# EAGLE board dac8 (EAGLE 5.06)
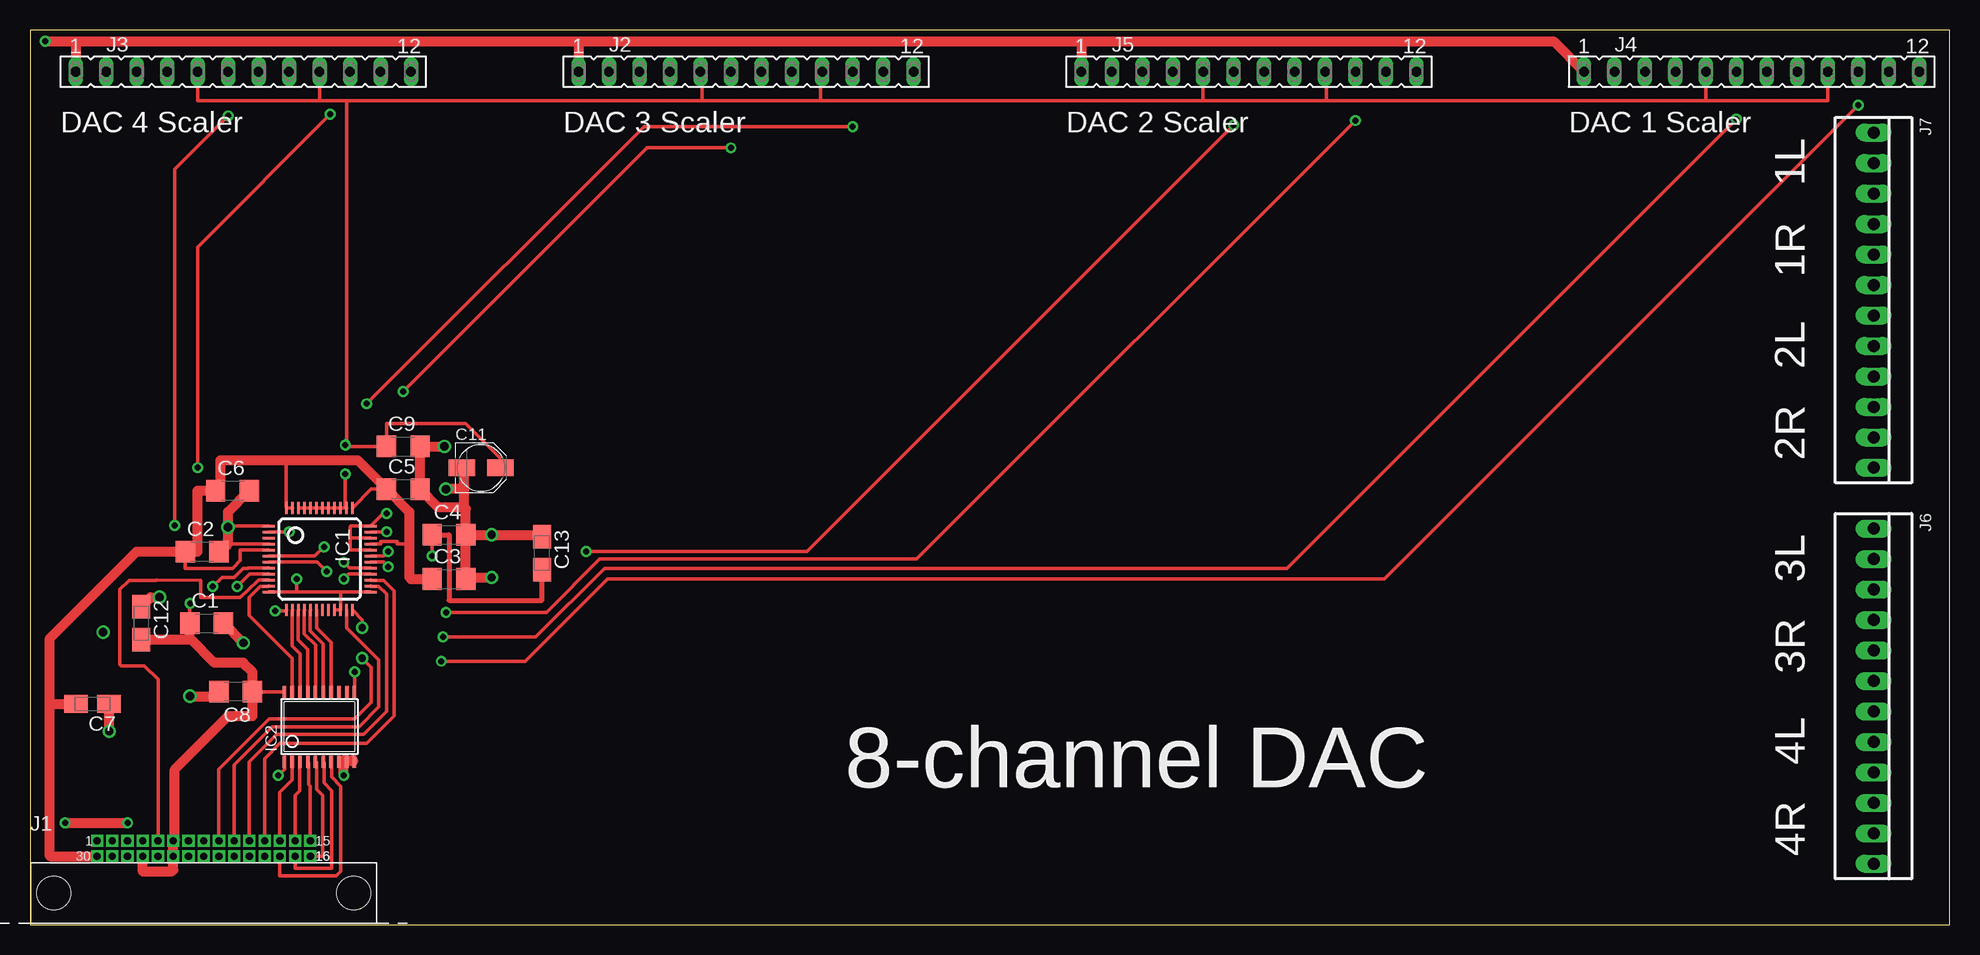
[diagram p0: board, top side]
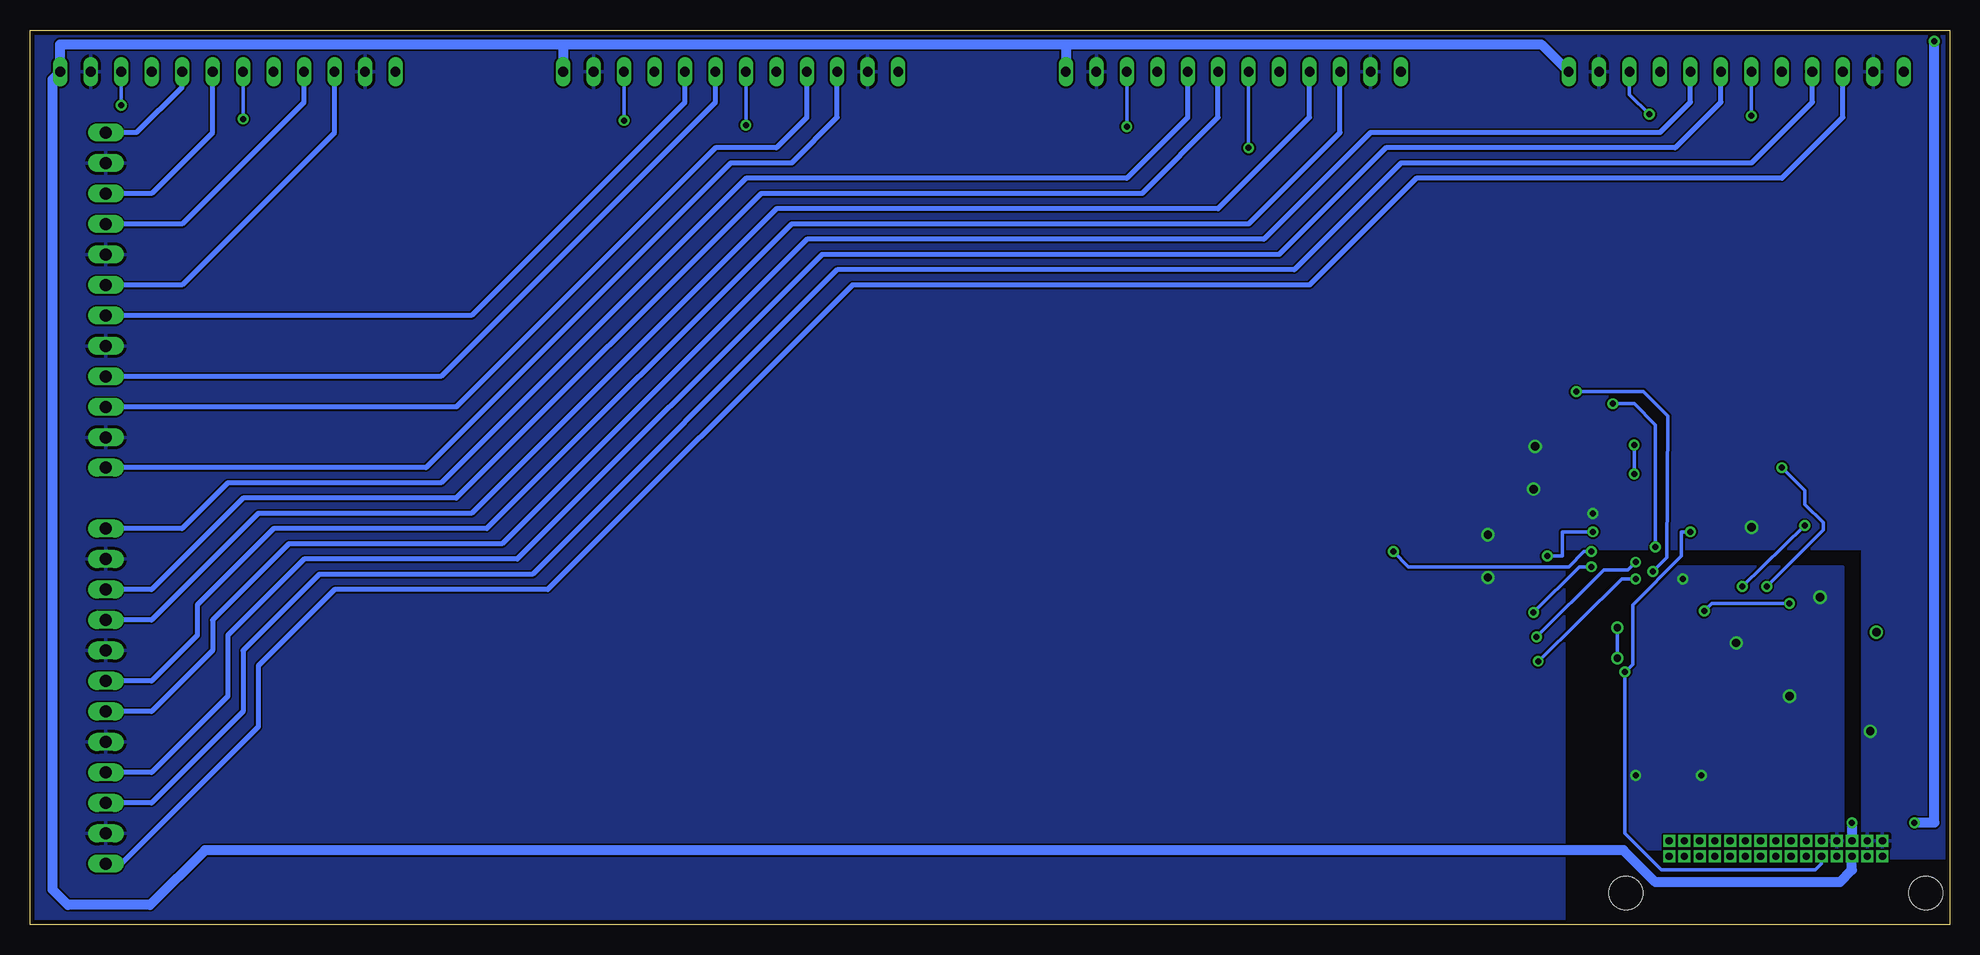
[diagram p1: board, bottom side, seen from below]

Size 160 x 74.6 mm. Coordinates in mm from the lower left corner, seen from the top.
Outline: 0,0 160,0 160,74.6 0,74.6 0,0
Copper layers (1*16): Top 0.035mm / dielectric 1.5mm / Bottom 0.035mm
Design rules "6mils *": minimum track width 6mil, minimum drill 15mil, track to track 6mil, track to pad 6mil, pad to pad 6mil, via to via 6mil, smd to smd 6mil, copper to edge 15mil, drill to drill 8mil, minimum pad ring 8mil, minimum via ring 8mil, stop-mask expansion 4mil, vias tented up to drill 0mil, thermal gap 10mil

## Footprints (pad centres in the part's own frame; a part is rotated, then mirrored left to right if it is on the bottom)
C1206 = smd 1.6 x 1.8: 1 -1.4,0; 2 1.4,0
A/3216-18R = smd 1.95 x 1.5: + 1.375,0; - -1.375,0
PANASONIC_B = smd 2.2 x 1.4: + 1.6,0; - -1.6,0
LQFP48 = smd 0.2 x 1: 1 -2.75,-4.25; 2 -2.25,-4.25; 3 -1.75,-4.25; 4 -1.25,-4.25; 5 -0.75,-4.25; 6 -0.25,-4.25; 7 0.25,-4.25; 8 0.75,-4.25; 9 1.25,-4.25; 10 1.75,-4.25; 11 2.25,-4.25; 12 2.75,-4.25; 25 2.75,4.25; 26 2.25,4.25; 27 1.75,4.25; 28 1.25,4.25; 29 0.75,4.25; 30 0.25,4.25; 31 -0.25,4.25; 32 -0.75,4.25; 33 -1.25,4.25; 34 -1.75,4.25; 35 -2.25,4.25; 36 -2.75,4.25 | smd 1 x 0.2: 13 4.25,-2.75; 14 4.25,-2.25; 15 4.25,-1.75; 16 4.25,-1.25; 17 4.25,-0.75; 18 4.25,-0.25; 19 4.25,0.25; 20 4.25,0.75; 21 4.25,1.25; 22 4.25,1.75; 23 4.25,2.25; 24 4.25,2.75; 37 -4.25,2.75; 38 -4.25,2.25; 39 -4.25,1.75; 40 -4.25,1.25; 41 -4.25,0.75; 42 -4.25,0.25; 43 -4.25,-0.25; 44 -4.25,-0.75; 45 -4.25,-1.25; 46 -4.25,-1.75; 47 -4.25,-2.25; 48 -4.25,-2.75
TSSOP20 = smd 0.305 x 0.991: 1 -2.925,-2.918; 2 -2.275,-2.918; 3 -1.625,-2.918; 4 -0.975,-2.918; 5 -0.325,-2.918; 6 0.325,-2.918; 7 0.975,-2.918; 8 1.625,-2.918; 9 2.275,-2.918; 10 2.925,-2.918; 11 2.925,2.918; 12 2.275,2.918; 13 1.625,2.918; 14 0.975,2.918; 15 0.325,2.918; 16 -0.325,2.918; 17 -0.975,2.918; 18 -1.625,2.918; 19 -2.275,2.918; 20 -2.925,2.918
FCI-RA-30 = drill 0.6 pad 0.813 square: P$A1 -8.89,0.635; P$A2 -7.62,0.635; P$A3 -6.35,0.635; P$A4 -5.08,0.635; P$A5 -3.81,0.635; P$A6 -2.54,0.635; P$A7 -1.27,0.635; P$A8 0,0.635; P$A9 1.27,0.635; P$A10 2.54,0.635; P$A11 3.81,0.635; P$A12 5.08,0.635; P$A13 6.35,0.635; P$A14 7.62,0.635; P$A15 8.89,0.635; P$A16 8.89,-0.635; P$A17 7.62,-0.635; P$A18 6.35,-0.635; P$A19 5.08,-0.635; P$A20 3.81,-0.635; P$A21 2.54,-0.635; P$A22 1.27,-0.635; P$A23 0,-0.635; P$A24 -1.27,-0.635; P$A25 -2.54,-0.635; P$A26 -3.81,-0.635; P$A27 -5.08,-0.635; P$A28 -6.35,-0.635; P$A29 -7.62,-0.635; P$A30 -8.89,-0.635 | hole 2.8: -12.497,-3.708; 12.497,-3.708
FE12 = drill 0.813 long: 1 -13.97,0; 2 -11.43,0; 3 -8.89,0; 4 -6.35,0; 5 -3.81,0; 6 -1.27,0; 7 1.27,0; 8 3.81,0; 9 6.35,0; 10 8.89,0; 11 11.43,0; 12 13.97,0
22-23-2121 = drill 1 long: 1 -13.97,0; 2 -11.43,0; 3 -8.89,0; 4 -6.35,0; 5 -3.81,0; 6 -1.27,0; 7 1.27,0; 8 3.81,0; 9 6.35,0; 10 8.89,0; 11 11.43,0; 12 13.97,0

## Placement (x,y rotation side)
C1  0.1u  [C1206]  14.73,25.15 0 top
C2  0.1u  [C1206]  14.35,31.11 0 top
C3  0.1u  [C1206]  34.92,28.83 0 top
C4  0.1u  [C1206]  34.92,32.51 0 top
C5  0.1u  [C1206]  31.11,36.32 0 top
C6  0.1u  [C1206]  16.89,36.2 0 top
C7  22u  [A/3216-18R]  5.21,18.41 180 top
C8  0.1u  [C1206]  17.14,19.43 180 top
C9  0.1u  [C1206]  31.11,39.88 0 top
C11  47u  [PANASONIC_B]  37.59,38.1 0 top
C12  22u  [A/3216-18R]  9.27,25.15 270 top
C13  10u  [A/3216-18R]  42.67,30.99 270 top
IC1  AD1934YST  [LQFP48]  24.13,30.48 270 top
IC2  74LVTH574  [TSSOP20]  24.13,16.51 0 top
J1  RA-30  [FCI-RA-30]  14.48,6.35 0 top
J2  Header  [FE12]  59.69,71.12 0 top
J3  Header  [FE12]  17.78,71.12 0 top
J4  Header  [FE12]  143.51,71.12 0 top
J5  Header  [FE12]  101.6,71.12 0 top
J6  RA Pol-Header  [22-23-2121]  153.67,19.05 270 top
J7  RA Pol-Header  [22-23-2121]  153.67,52.07 270 top

## Library data of the parts
C1-C9 C11-C13 = rcl
IC1 IC2 J1 = cdp
J2-J5 = con-lsta
J6 J7 = con-molex

## Nets
!CS: IC1.27 J1.P$A12
+15V: J1.P$A28 J2.12 J3.12 J4.12 J5.12
-15V: J1.P$A3 J2.1 J3.1 J4.1 J5.1
A3.3V: C2.1 C3.1 C5.1 C6.1 C7.+ IC1.5 IC1.33 IC1.37 IC1.47 IC1.48 J1.P$A30
A5V: J1.P$A29
AGND: C2.2 C3.2 C4.2 C5.2 C6.2 C7.- C9.2 C11.- C13.- IC1.1 IC1.4 IC1.32 IC1.34 IC1.36 J1.P$A1 J1.P$A2 J2.2 J2.11 J3.2 J3.11 J4.2 J4.11 J5.2 J5.11 J6.2 J6.5 J6.8 J6.11 J7.2 J7.5 J7.8 J7.11
CLK: IC1.2 IC2.11 J1.P$A26
CM: C9.1 C11.+ IC1.38 IC1.39 IC1.40 IC1.41 IC1.42 IC1.43 IC1.44 IC1.45 IC1.46 J2.5 J2.9 J3.5 J3.9 J4.5 J4.9 J5.5 J5.9
D3.3V: C1.1 C8.1 C12.+ IC1.13 IC2.20 J1.P$A6 J1.P$A25 J1.P$A27
DATA0: IC2.2 J1.P$A13
DATA1: IC2.3 J1.P$A14
DATA2: IC2.4 J1.P$A15
DATA3: IC2.5 J1.P$A16
DATA4: IC2.6 J1.P$A17
DATA5: IC2.7 J1.P$A18
DGND: C1.2 C8.2 C12.- IC1.12 IC1.21 IC1.22 IC1.25 IC2.1 IC2.8 IC2.9 IC2.10 J1.P$A4
DOL1: IC1.28 J4.10
DOL2: IC1.30 J5.10
DOL3: IC1.6 J2.10
DOL4: IC1.8 J3.10
DOR1: IC1.29 J4.6
DOR2: IC1.31 J5.6
DOR3: IC1.7 J2.6
DOR4: IC1.9 J3.6
MCLK: IC1.26 J1.P$A11
MDI: IC1.23 J1.P$A10
MDO: IC1.24 J1.P$A9
N$7: C4.1 C13.+ IC1.35
OL1N: J4.7 J7.3
OL1P: J4.8 J7.1
OL2N: J5.7 J7.9
OL2P: J5.8 J7.7
OL3N: J2.7 J6.3
OL3P: J2.8 J6.1
OL4N: J3.7 J6.9
OL4P: J3.8 J6.7
OR1N: J4.3 J7.6
OR1P: J4.4 J7.4
OR2N: J5.3 J7.12
OR2P: J5.4 J7.10
OR3N: J2.3 J6.6
OR3P: J2.4 J6.4
OR4N: J3.3 J6.12
OR4P: J3.4 J6.10
RDATA0: IC1.11 IC2.19
RDATA1: IC1.14 IC2.18
RDATA2: IC1.15 IC2.17
RDATA3: IC1.16 IC2.16
RDATA4: IC1.17 IC2.15
RDATA5: IC1.18 IC2.14
RESET: IC1.10 J1.P$A5

## Tracks (layer width: path | path; a pad name or v marks a point on that pad's centre or on a via)
!CS
  Top 0.305: J1.P$A12 19.56,13.84 20.83,15.11 28.07,15.11 30.35,17.4 30.35,27.81 29.46,28.7 28.41,28.7 IC1.27
+15V
  Bottom 0.813: J1.P$A28 8.13,4.57 9.14,3.56 24.51,3.56 27.18,6.22 145.41,6.22 149.99,1.65 156.84,1.65 158.12,2.92 158.12,70.48 J4.12 157.48,73.41 115.57,73.41 | 115.57,73.41 73.41,73.41 | 73.41,73.41 34.04,73.41 J3.12 | J2.12 73.66,73.15 73.41,73.41 | 115.57,73.41 J5.12
-15V  (via drill 0.5)
  Top 0.813: v2.92,8.51 v8.13,8.51 | v1.27,73.66 3.81,73.66 | 3.81,73.66 45.72,73.66 | 45.72,73.66 87.63,73.66 | 87.63,73.66 127,73.66 J4.1 | 3.81,73.66 J3.1 | 45.72,73.66 J2.1 | 87.63,73.66 J5.1
  Bottom 0.813: v8.13,8.51 J1.P$A3 | v2.92,8.51 1.27,8.51 v1.27,73.66
A3.3V
  Top 0.305: IC1.5 19.77,31.24 17.53,31.24 17.53,30.35 16.89,29.72 13.72,29.72 12.95,29.72 C2.1 | IC1.47 IC1.48 21.34,34.77 21.34,38.73 | IC1.37 26.92,34.77 26.92,34.8 28.45,36.32 C5.1 | IC1.33 28.49,31.75 29.21,31.75 29.21,31.95 30.61,31.95 30.61,31.75 31.62,31.75
  Top 0.813: J1.P$A30 1.65,5.71 1.65,18.41 | 1.65,18.41 1.65,23.88 8.89,31.11 C2.1 13.97,31.11 13.97,36.2 C6.1 15.88,36.2 15.88,38.73 21.34,38.73 27.3,38.73 C5.1 31.62,34.41 31.62,31.75 31.62,28.96 31.75,28.83 C3.1 | 1.65,18.41 C7.+
AGND  (via drill 0.5, 0.7)
  Top 0.305: 19.9,31.75 IC1.4 | 19.9,31.75 19.94,31.75 | 16.51,31.75 19.9,31.75 | v29.72,34.29 29.44,34.29 IC1.36 26.71,33.23 26.67,33.15 26.67,32.26 | IC1.34 28.35,32.26 26.67,32.26 | IC1.32 26.67,31.23 26.67,32.26 | IC1.1 16.59,33.23 v16.51,33.15
  Top 0.813: C7.- 6.6,18.39 v6.6,16.13 | C6.2 16.51,34.42 v16.51,33.15 16.51,32.26 16.51,31.75 C2.2 | C9.2 32.38,39.88 32.52,39.75 C5.2 34.04,34.8 36.2,34.8 | C9.2 | 36.2,34.8 36.33,34.67 C4.2 C3.2 | C11.- 35.94,38.1 36.2,37.85 36.2,36.32 | 36.2,34.8 36.2,36.32 | C9.2 v34.54,39.88 | 36.2,36.32 v34.67,36.32 | 36.32,28.96 v38.48,28.96 | C4.2 v38.48,32.51 42.55,32.51 42.55,32.26 C13.-
  pour Bottom: 0.13,5.59 7.24,5.59 7.24,31.37 32.13,31.37 32.13,0.38 159.64,0.38 159.64,74.42 0.13,74.42
CLK  (via drill 0.5)
  Top 0.305: v21.59,32.77 19.92,32.77 IC1.2 | IC2.11 v27.05,21.08
  Bottom 0.305: J1.P$A26 10.67,5.08 11.18,4.57 24,4.57 27.05,7.62 v27.05,21.08 26.42,21.72 26.42,26.67 22.35,30.73 22.35,32.77 v21.59,32.77
CM  (via drill 0.5)
  Top 0.305: IC1.46 IC1.45 IC1.44 IC1.43 IC1.42 IC1.41 IC1.40 IC1.39 IC1.38 26.29,34.82 v26.29,37.59 | 29.59,39.88 26.42,39.88 v26.29,40.01 26.42,40.13 26.42,68.71 | 29.59,39.88 C9.1 | 29.59,39.88 29.72,40.01 29.72,41.78 36.32,41.78 39.19,38.91 C11.+ | 26.42,68.71 24.13,68.71 | 24.13,68.71 13.97,68.71 J3.5 | 26.42,68.71 56.01,68.71 | 56.01,68.71 65.91,68.71 | 65.91,68.71 97.79,68.71 | 97.79,68.71 108.08,68.71 | 108.08,68.71 139.7,68.71 | 139.7,68.71 149.86,68.71 J4.9 | 108.08,68.71 108.08,71.12 J5.9 | J2.9 65.91,71.12 65.91,68.71 | J2.5 56.01,71.12 56.01,68.71 | 24.13,68.71 J3.9 | 139.7,68.71 J4.5 | 97.79,68.71 J5.5
  Bottom 0.305: v26.29,37.59 v26.29,40.01
D3.3V  (via drill 0.5)
  Top 0.305: C8.1 IC2.20 | IC1.13 21.31,26.16 v20.45,26.16 | v13.34,26.8 v13.33,26.79 C1.1
  Top 0.813: J1.P$A27 9.4,4.45 11.81,4.45 11.94,4.57 J1.P$A25 J1.P$A6 12.06,7.11 12.06,12.95 16.51,17.4 18.54,17.4 18.55,17.4 C8.1 18.55,21.08 17.78,21.84 15.37,21.84 13.46,23.75 | C12.+ 9.29,23.75 13.46,23.75 | 13.46,23.75 13.33,23.88 C1.1
  Bottom 0.305: v20.45,26.16 19.81,26.8 v13.34,26.8
DATA0
  Top 0.305: J1.P$A13 20.83,11.05 21.84,12.06 21.84,13.58 IC2.2
DATA1
  Top 0.305: J1.P$A14 22.1,10.79 22.48,11.18 22.48,13.57 IC2.3
DATA2
  Top 0.305: J1.P$A15 23.37,11.56 23.24,11.68 23.24,13.51 IC2.4
DATA3
  Top 0.305: J1.P$A16 24.38,5.71 24.38,10.79 23.88,11.3 23.88,13.52 IC2.5
DATA4
  Top 0.305: J1.P$A17 22.1,4.7 25.15,4.7 25.15,11.18 24.51,11.81 24.51,13.54 IC2.6
DATA5
  Top 0.305: J1.P$A18 20.83,4.06 25.53,4.06 25.91,4.45 25.91,11.56 25.15,12.32 25.15,13.55 IC2.7
DGND  (via drill 0.5, 0.7)
  Top 0.305: IC2.9 IC2.10 | IC2.9 IC2.8 | IC2.1 21.21,12.96 v20.7,12.45 | 25.88,27.73 IC1.25 | IC1.21 IC1.22 25.88,27.73 | IC1.12 22.23,27.73 | 22.23,27.73 25.88,27.73 | 22.23,27.73 v22.23,28.83 | 26.42,13.72 26.41,13.71 IC2.9
  Top 0.813: C12.- 10.05,27.3 v10.79,27.3 | C1.2 v17.78,23.5 | C8.2 15.36,19.05 v13.34,19.05 | v26.16,12.45 26.16,13.59 | 26.16,13.59 26.16,13.72 | IC2.9 26.16,13.59 | 26.42,13.72 26.92,13.72 26.92,13.59
  pour Bottom: 8.89,6.35 29.59,6.35 29.59,29.84 8.89,29.84
DOL1  (via drill 0.5)
  Top 0.305: IC1.28 26.56,29.23 v26.16,28.83 | v34.29,21.97 41.27,21.97 48.13,28.83 112.9,28.83 v152.4,68.33
  Bottom 0.305: v26.16,28.83 27.3,28.83 v34.29,21.97 | v152.4,68.33 J4.10
DOL2  (via drill 0.5)
  Top 0.305: IC1.30 29.46,30.23 v29.84,29.84 | v34.67,26.04 43.05,26.04 47.5,30.48 73.91,30.48 v110.49,67.06
  Bottom 0.305: v29.84,29.84 30.86,29.84 v34.67,26.04 | v110.49,67.06 J5.10
DOL3  (via drill 0.5)
  Top 0.305: IC1.6 23.75,30.73 v24.51,31.5 | v28.07,43.43 51.18,66.55 v68.58,66.55
  Bottom 0.305: v24.51,31.5 24.51,41.66 26.29,43.43 v28.07,43.43 | v68.58,66.55 J2.10
DOL4  (via drill 0.5)
  Top 0.305: IC1.8 18.17,29.73 18.16,29.72 17.78,29.72 17.02,28.96 16,28.96 v15.24,28.19 | v13.97,38.1 13.97,56.52 v25.02,67.56
  Bottom 0.305: v15.24,28.19 10.54,32.89 10.54,33.53 12.06,35.05 12.06,36.2 v13.97,38.1 | v25.02,67.56 26.67,69.22 J3.10
DOR1  (via drill 0.5)
  Top 0.305: IC1.29 26.66,29.73 v26.16,30.23 | v34.42,24 42.16,24 47.88,29.72 104.78,29.72 v142.24,67.18
  Bottom 0.305: v26.16,30.23 26.8,29.59 28.83,29.59 v34.42,24 | v142.24,67.18 J4.6
DOR2  (via drill 0.5)
  Top 0.305: IC1.31 29.46,30.73 v29.84,31.11 | v46.35,31.11 64.77,31.11 v100.33,66.67
  Bottom 0.305: v29.84,31.11 30.48,31.11 31.75,29.84 45.09,29.84 v46.35,31.11 | v100.33,66.67 J5.6
DOR3  (via drill 0.5)
  Top 0.305: IC1.7 23.95,30.23 v24.71,29.46 | v31.11,44.45 51.44,64.77 v58.42,64.77
  Bottom 0.305: v24.71,29.46 23.55,30.63 23.5,42.42 25.53,44.45 v31.11,44.45 | v58.42,64.77 J2.6
DOR4  (via drill 0.5)
  Top 0.305: IC1.9 18.31,29.23 v17.27,28.19 | v12.06,33.27 12.06,62.99 v16.51,67.44
  Bottom 0.305: v12.06,33.27 v17.27,28.19 | v16.51,67.44 J3.6
MCLK
  Top 0.305: J1.P$A11 18.29,13.59 20.57,15.88 27.81,15.88 29.72,17.78 29.72,27.56 29.08,28.19 28.42,28.19 IC1.26
MDI
  Top 0.305: J1.P$A10 17.02,13.34 20.19,16.51 27.43,16.51 29.08,18.16 29.08,22.1 26.42,24.77 26.42,26.14 IC1.23
MDO  (via drill 0.6)
  Top 0.305: J1.P$A9 15.75,12.95 19.94,17.14 27.05,17.14 28.45,18.54 28.45,21.46 v27.69,22.23 | v27.69,24.77 27.69,25.42 IC1.24
  Bottom 0.305: v27.69,22.23 v27.69,24.77
N$1  (via drill 0.7)
  other vias: 6.1,24.38
N$7  (via drill 0.5)
  Top 0.305: IC1.35 29.72,32.73 v29.72,32.77 | C4.1 v33.53,30.73
  Top 0.406: C4.1 34.92,32.51 34.92,27.05 42.67,27.05 C13.+
  Bottom 0.305: v29.72,32.77 32.26,32.77 32.26,31.62 | 32.26,31.62 32.26,31.5 | v33.53,30.73 32.26,30.73 32.26,31.62
OL1N
  Bottom 0.406: J7.3 149.86,60.96 144.78,66.04 J4.7
OL1P
  Bottom 0.406: J7.1 151.13,66.04 147.32,69.85 J4.8
OL2N
  Bottom 0.406: J7.9 125.73,45.72 102.87,68.58 J5.7
OL2P
  Bottom 0.406: J7.7 123.19,50.8 105.41,68.58 J5.8
OL3N
  Bottom 0.406: J6.3 149.86,27.94 142.24,35.56 124.46,35.56 99.06,60.96 67.31,60.96 60.96,67.31 J2.7
OL3P
  Bottom 0.406: J6.1 147.32,33.02 143.51,36.83 125.73,36.83 100.33,62.23 68.58,62.23 63.5,67.31 J2.8
OL4N
  Bottom 0.406: J6.9 149.86,12.7 143.51,19.05 143.51,24.13 137.16,30.48 119.38,30.48 93.98,55.88 55.88,55.88 46.99,64.77 22.86,64.77 19.05,68.58 J3.7
OL4P
  Bottom 0.406: J6.7 149.86,17.78 144.78,22.86 144.78,25.4 138.43,31.75 120.65,31.75 95.25,57.15 57.15,57.15 48.26,66.04 24.13,66.04 21.59,68.58 J3.8
OR1N
  Bottom 0.406: J7.6 147.32,53.34 134.62,66.04 J4.3
OR1P
  Bottom 0.406: J7.4 147.32,58.42 137.16,68.58 J4.4
OR2N
  Bottom 0.406: J7.12 127,38.1 101.6,63.5 96.52,63.5 92.71,67.31 J5.3
OR2P
  Bottom 0.406: J7.10 124.46,43.18 102.87,64.77 97.79,64.77 95.25,67.31 J5.4
OR3N
  Bottom 0.406: J6.6 149.86,20.32 146.05,24.13 146.05,26.67 139.7,33.02 121.92,33.02 96.52,58.42 58.42,58.42 50.8,66.04 J2.3
OR3P
  Bottom 0.406: J6.4 149.86,25.4 140.97,34.29 123.19,34.29 97.79,59.69 60.96,59.69 53.34,67.31 J2.4
OR4N
  Bottom 0.406: J6.12 152.4,5.08 140.97,16.51 140.97,21.59 134.62,27.94 116.84,27.94 91.44,53.34 53.34,53.34 44.45,62.23 13.97,62.23 8.89,67.31 J3.3
OR4P
  Bottom 0.406: J6.10 149.86,10.16 142.24,17.78 142.24,22.86 135.89,29.21 118.11,29.21 92.71,54.61 54.61,54.61 45.72,63.5 16.51,63.5 11.43,68.58 J3.4
RDATA0
  Top 0.305: IC2.19 21.86,22.21 18.29,25.78 18.29,27.3 19.18,28.19 19.84,28.19 IC1.11
RDATA1
  Top 0.305: IC2.18 22.5,22.58 21.84,23.24 21.84,26.19 IC1.14
RDATA2
  Top 0.305: IC2.17 23.16,22.95 22.35,23.75 22.35,26.2 IC1.15
RDATA3
  Top 0.305: IC2.16 23.8,23.31 22.86,24.26 22.86,26.21 IC1.16
RDATA4
  Top 0.305: IC2.15 24.45,23.42 23.37,24.51 23.37,26.22 IC1.17
RDATA5
  Top 0.305: IC2.14 25.11,23.54 23.88,24.77 IC1.18
RESET
  Top 0.305: J1.P$A5 10.67,20.45 9.53,21.59 7.62,21.59 7.49,21.72 7.49,27.94 8.26,28.7 10.54,28.7 10.57,28.73 14.22,28.7 14.22,27.3 17.53,27.3 18.92,28.6 19.05,28.73 IC1.10

## Text on the board
tPlace: DAC 4 Scaler | DAC 3 Scaler | DAC 2 Scaler | DAC 1 Scaler | 1L | 1R | 2L | 2R | 3L | 3R | 4L | 8-channel DAC | 8-channel DAC | 4R